# EAGLE board Dashboard r2 (EAGLE 7.4.0)
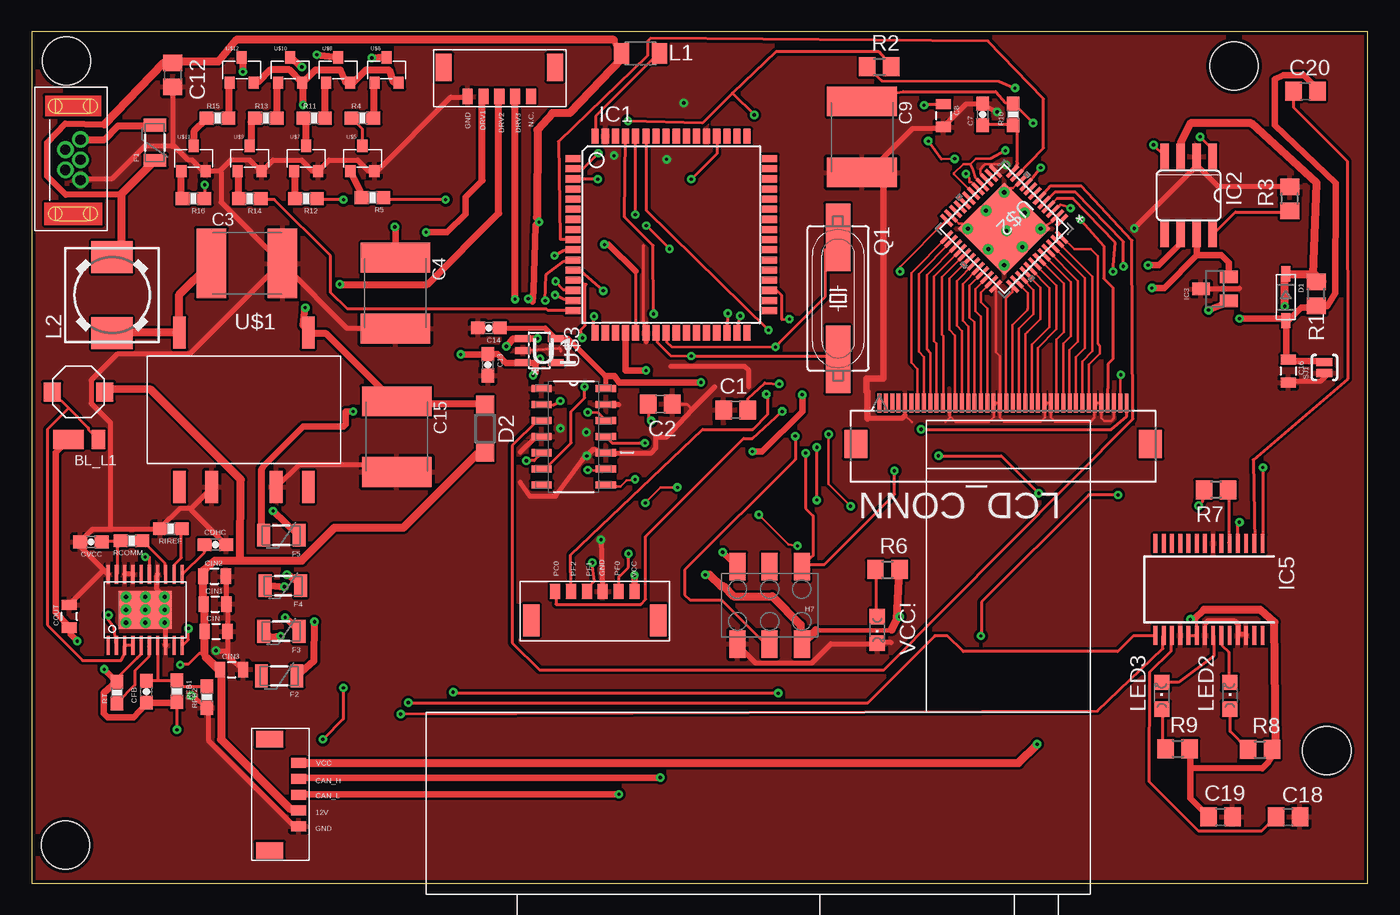
[diagram p0: board, top side]
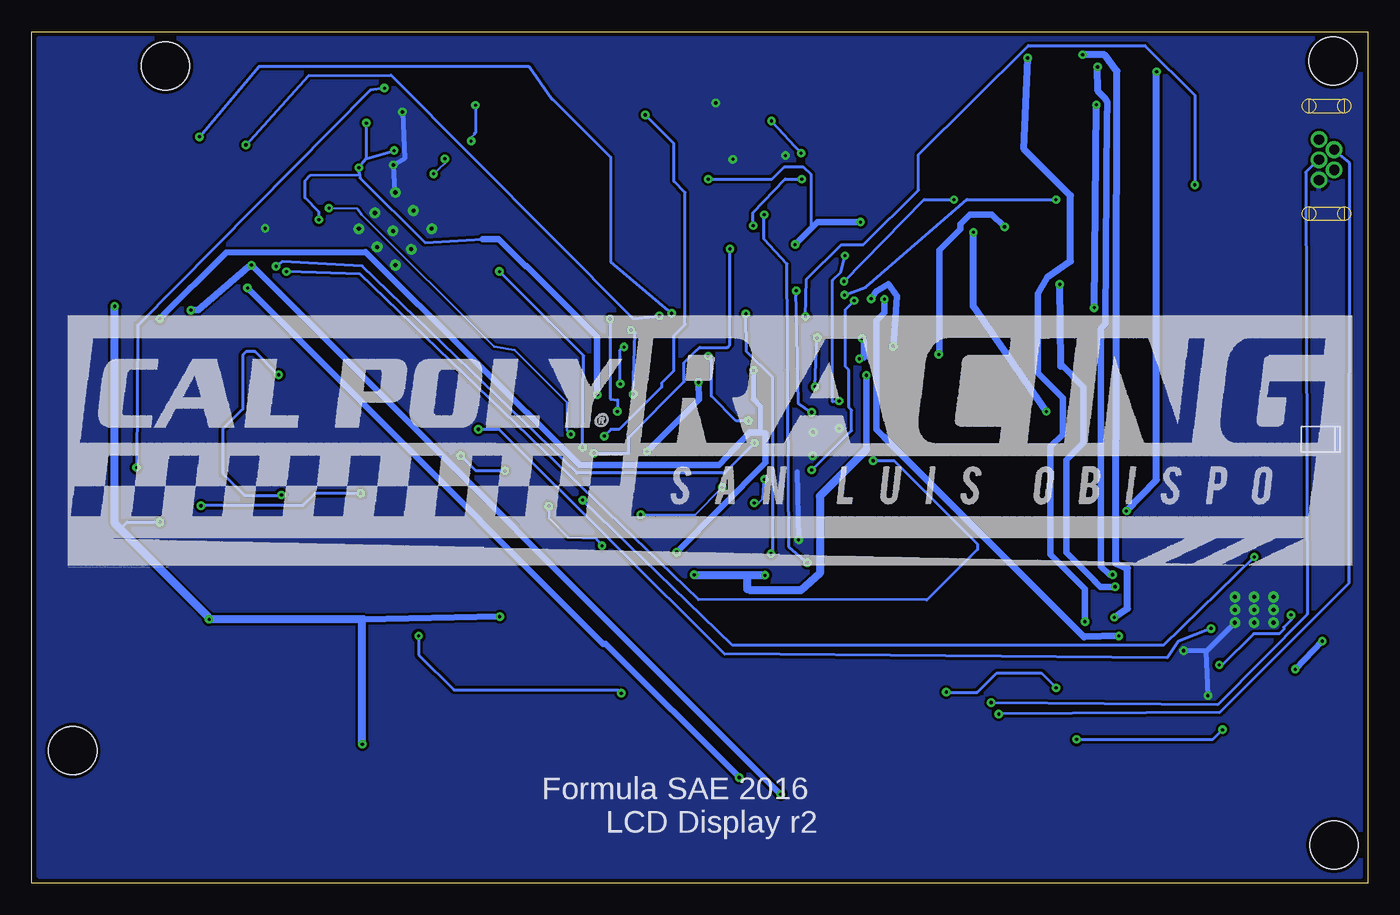
[diagram p1: board, bottom side, seen from below]

Size 105.5 x 67.24 mm. Coordinates in mm from the lower left corner, seen from the top.
Outline: 0,0 105.5,0 105.5,67.24 0,67.24 0,0
Copper layers (1*16): Top 0.035559375mm / dielectric 1.501140625mm / Bottom 0.035559375mm
Design rules "advancedcircuits *": minimum track width 7mil, minimum drill 10mil, track to track 7mil, track to pad 7mil, pad to pad 7mil, via to via 7mil, smd to smd 7mil, copper to edge 11mil, drill to drill 11mil, minimum pad ring 10mil, minimum via ring 8mil, stop-mask expansion 0mil, vias tented up to drill 0mil, thermal gap 10mil
Net classes: 0 default: width 0.254 mm, clearance 0.205 mm; 1 Class1: width 0.508 mm, clearance 0.205 mm to class 0, clearance 0.205 mm; 2 Class2: width 0.635 mm, clearance 0.205 mm to class 0, clearance 0.205 mm to class 1, clearance 0.205 mm; 3 Class3: width 0.559 mm, clearance 0.205 mm to class 0, clearance 0.205 mm to class 1, clearance 0.205 mm to class 2, clearance 0.205 mm; 4 Class4: width 0.406 mm, clearance 0.205 mm to class 0, clearance 0.205 mm to class 1, clearance 0.205 mm to class 2, clearance 0.205 mm to class 3, clearance 0.205 mm; 5 Class5: width 0.178 mm, drill 0.178 mm, clearance 0.178 mm to class 0, clearance 0.178 mm to class 1, clearance 0.178 mm to class 2, clearance 0.178 mm to class 3, clearance 0.178 mm to class 4, clearance 0.178 mm
Holes 3.81 mm at 2.76,64.91 2.67,3.01 102.26,10.46 94.93,64.53

## Footprints (pad centres in the part's own frame; a part is rotated, then mirrored left to right if it is on the bottom)
POWERDI-123 = smd 1.05 x 1.5: A -0.85,0 | smd 2.4 x 1.5: C 1.525,0
2-SMD = smd 1.35 x 1.5: 1 -2.075,0; 2 2.075,0
C0805 = smd 1.3 x 1.5: 1 -0.95,0; 2 0.95,0
C2220 = smd 2.35 x 5.5: 1 -2.8,0; 2 2.8,0
0603-CAP = smd 1.1 x 1: 1 -0.85,0; 2 0.85,0
0805 = smd 0.8 x 1.2: 1 -0.9,0; 2 0.9,0
MICRO5LOCK = smd 0.8 x 1.2: P1 -2.5,0; P2 -1.25,0; P3 0,0; P4 1.25,0; P5 2.5,0 | smd 1.3 x 2.15: P$6 -4.4,2.295; P$7 4.4,2.295
SOD-123 = smd 1.2 x 0.7: A 1.85,0; C -1.85,0
SOD123 = smd 1.4 x 1.4: A 1.9,0; C -1.9,0
PTC-1206 = smd 1 x 1.8: 1 -1.4,0; 2 1.4,0
2X3_SMD_FCI_54202-G30 = smd 1.27 x 2.18: 1 -2.54,-3.05; 2 -2.54,3.05; 3 0,-3.05; 4 0,3.05; 5 2.54,-3.05; 6 2.54,3.05
TQFP64 = smd 1.194 x 0.559: 1 -7.76,6; 2 -7.76,5.2; 3 -7.76,4.4; 4 -7.76,3.6; 5 -7.76,2.8; 6 -7.76,2; 7 -7.76,1.2; 8 -7.76,0.4; 9 -7.76,-0.4; 10 -7.76,-1.2; 11 -7.76,-2; 12 -7.76,-2.8; 13 -7.76,-3.6; 14 -7.76,-4.4; 15 -7.76,-5.2; 16 -7.76,-6; 33 7.76,-6; 34 7.76,-5.2; 35 7.76,-4.4; 36 7.76,-3.6; 37 7.76,-2.8; 38 7.76,-2; 39 7.76,-1.2; 40 7.76,-0.4; 41 7.76,0.4; 42 7.76,1.2; 43 7.76,2; 44 7.76,2.8; 45 7.76,3.6; 46 7.76,4.4; 47 7.76,5.2; 48 7.76,6 | smd 0.559 x 1.194: 17 -6,-7.76; 18 -5.2,-7.76; 19 -4.4,-7.76; 20 -3.6,-7.76; 21 -2.8,-7.76; 22 -2,-7.76; 23 -1.2,-7.76; 24 -0.4,-7.76; 25 0.4,-7.76; 26 1.2,-7.76; 27 2,-7.76; 28 2.8,-7.76; 29 3.6,-7.76; 30 4.4,-7.76; 31 5.2,-7.76; 32 6,-7.76; 49 6,7.76; 50 5.2,7.76; 51 4.4,7.76; 52 3.6,7.76; 53 2.8,7.76; 54 2,7.76; 55 1.2,7.76; 56 0.4,7.76; 57 -0.4,7.76; 58 -1.2,7.76; 59 -2,7.76; 60 -2.8,7.76; 61 -3.6,7.76; 62 -4.4,7.76; 63 -5.2,7.76; 64 -6,7.76
SO08 = smd 0.66 x 2.032: 1 -1.905,-3.073; 2 -0.635,-3.073; 3 0.635,-3.073; 4 1.905,-3.073; 5 1.905,3.073; 6 0.635,3.073; 7 -0.635,3.073; 8 -1.905,3.073
SOT-23 = smd 1 x 1.4: 1 -0.95,-1.1; 2 0.95,-1.1; 3 0,1.1
SSOP28 = smd 0.381 x 1.499: 1 -4.225,-3.625; 2 -3.575,-3.625; 3 -2.925,-3.625; 4 -2.275,-3.625; 5 -1.625,-3.625; 6 -0.975,-3.625; 7 -0.325,-3.625; 8 0.325,-3.625; 9 0.975,-3.625; 10 1.625,-3.625; 11 2.275,-3.625; 12 2.925,-3.625; 13 3.575,-3.625; 14 4.225,-3.625; 15 4.225,3.625; 16 3.575,3.625; 17 2.925,3.625; 18 2.275,3.625; 19 1.625,3.625; 20 0.975,3.625; 21 0.325,3.625; 22 -0.325,3.625; 23 -0.975,3.625; 24 -1.625,3.625; 25 -2.275,3.625; 26 -2.925,3.625; 27 -3.575,3.625; 28 -4.225,3.625
L3216C = smd 1.2 x 1.6: 1 -1.5,0; 2 1.5,0
DR73 = smd 2.5 x 3.25: 1 -3,0; 2 3,0
HIROSE_FH12A-40S-0.5SH(55) = smd 1.803 x 2.21: 41 -11.633,6.68; 42 11.633,6.68 | smd 0.305 x 1.499: P1 -9.754,3.429; P2 -9.246,3.429; P3 -8.738,3.429; P4 -8.255,3.429; P5 -7.747,3.429; P6 -7.239,3.429; P7 -6.756,3.429; P8 -6.248,3.429; P9 -5.74,3.429; P10 -5.258,3.429; P11 -4.75,3.429; P12 -4.242,3.429; P13 -3.759,3.429; P14 -3.251,3.429; P15 -2.743,3.429; P16 -2.261,3.429; P17 -1.753,3.429; P18 -1.245,3.429; P19 -0.762,3.429; P20 -0.254,3.429; P21 0.254,3.429; P22 0.762,3.429; P23 1.245,3.429; P24 1.753,3.429; P25 2.261,3.429; P26 2.743,3.429; P27 3.251,3.429; P28 3.759,3.429; P29 4.242,3.429; P30 4.75,3.429; P31 5.258,3.429; P32 5.74,3.429; P33 6.248,3.429; P34 6.756,3.429; P35 7.239,3.429; P36 7.747,3.429; P37 8.255,3.429; P38 8.738,3.429; P39 9.246,3.429; P40 9.754,3.429
CHIPLED_0805 = smd 1.2 x 1.2: A 0,-1.05; C 0,1.05
HC49UP = smd 5.334 x 1.93: 1 -4.826,0; 2 4.826,0
R0805 = smd 1.3 x 1.5: 1 -0.95,0; 2 0.95,0
0603-RES = smd 1.1 x 1: 1 -0.85,0; 2 0.85,0
MICRO6LOCK = smd 0.8 x 1.2: P1 3.125,0; P2 1.875,0; P3 0.625,0; P4 -0.625,0; P5 -1.875,0; P6 -3.125,0 | smd 1.3 x 2.5: P$1 -5.025,2.295; P$2 5.025,2.295
SJ_2S-NO = smd 0.635 x 1.27: 1 -0.45,0; 2 0.45,0
SOIC127P600X175-14N = smd 1.6 x 0.559: 1 -2.54,3.81; 2 -2.54,2.54; 3 -2.54,1.27; 4 -2.54,0; 5 -2.54,-1.27; 6 -2.54,-2.54; 7 -2.54,-3.81; 8 2.54,-3.81; 9 2.54,-2.54; 10 2.54,-1.27; 11 2.54,0; 12 2.54,1.27; 13 2.54,2.54; 14 2.54,3.81
V78XX-1000 = smd 1 x 2.54: 1 -5.08,-6.096; 5 5.08,-6.096; 6 5.08,6.096; 7 2.54,6.096; 9 -2.54,6.096; 10 -5.08,6.096
RGZ48_5P15X5P15 = smd 1.245 x 0.279: 1 -3.683,2.743; 2 -3.683,2.261; 3 -3.683,1.753; 4 -3.683,1.245; 5 -3.683,0.762; 6 -3.683,0.254; 7 -3.683,-0.254; 8 -3.683,-0.762; 9 -3.683,-1.245; 10 -3.683,-1.753; 11 -3.683,-2.261; 12 -3.683,-2.743; 25 3.683,-2.743; 26 3.683,-2.261; 27 3.683,-1.753; 28 3.683,-1.245; 29 3.683,-0.762; 30 3.683,-0.254; 31 3.683,0.254; 32 3.683,0.762; 33 3.683,1.245; 34 3.683,1.753; 35 3.683,2.261; 36 3.683,2.743 | smd 0.279 x 1.245: 13 -2.743,-3.683; 14 -2.261,-3.683; 15 -1.753,-3.683; 16 -1.245,-3.683; 17 -0.762,-3.683; 18 -0.254,-3.683; 19 0.254,-3.683; 20 0.762,-3.683; 21 1.245,-3.683; 22 1.753,-3.683; 23 2.261,-3.683; 24 2.743,-3.683; 37 2.743,3.683; 38 2.261,3.683; 39 1.753,3.683; 40 1.245,3.683; 41 0.762,3.683; 42 0.254,3.683; 43 -0.254,3.683; 44 -0.762,3.683; 45 -1.245,3.683; 46 -1.753,3.683; 47 -2.261,3.683; 48 -2.743,3.683 | smd 5.156 x 5.156: EP 0,0 | drill 0.33: V_1 -2.032,2.032; V_2 0,2.032; V_3 2.032,2.032; V_4 -2.032,0.254; V_5 0,0.254; V_6 2.032,0.254; V_7 -2.032,-2.032; V_8 0,-2.032; V_9 2.032,-2.032
SOT23-DBV = smd 0.55 x 1.2: 1 -0.95,-1.3; 2 0,-1.3; 3 0.95,-1.3; 4 0.95,1.3; 5 -0.95,1.3
PWP0020A = smd 0.25 x 1.5: 1 -2.925,-2.8; 2 -2.275,-2.8; 3 -1.625,-2.8; 4 -0.975,-2.8; 5 -0.325,-2.8; 6 0.325,-2.8; 7 0.975,-2.8; 8 1.625,-2.8; 9 2.275,-2.8; 10 2.925,-2.8; 11 2.925,2.8; 12 2.275,2.8; 13 1.625,2.8; 14 0.975,2.8; 15 0.325,2.8; 16 -0.325,2.8; 17 -0.975,2.8; 18 -1.625,2.8; 19 -2.275,2.8; 20 -2.925,2.8 | smd 4.2 x 3: EP 0,0 | drill 0.33: P$1 -1.524,1.016; P$2 0,1.016; P$3 1.524,1.016; P$4 -1.524,0; P$5 0,0; P$6 1.524,0; P$7 1.524,-1.016; P$8 0,-1.016; P$9 -1.524,-1.016
SOT-23-3 = smd 0.8 x 0.976: P$1 0,1; P$2 -0.95,-1; P$3 0.95,-1
MUSBB = drill 0.8: P1 -1.6,0; P2 -0.8,-1.2; P3 0,0; P4 0.8,-1.2; P5 1.6,0

## Placement (x,y rotation side)
BL_D1  DFLS1100-7  [POWERDI-123]  4.42,35.05 180 top
BL_L1  47uH  [2-SMD]  3.7,38.8 180 top
C1  18pF  [C0805]  55.58,37.37 0 top
C2  18pF  [C0805]  49.65,37.83 180 top
C3  22uF  [C2220]  17,48.94 0 top
C4  22uF  [C2220]  28.72,46.59 270 top
C7  100nF  [0603-CAP]  75.09,60.7 90 top
C8  4.7uF  [0805]  72,60.62 270 top
C9  10uF  [C2220]  65.56,58.92 270 top
C12  100n  [C0805]  11.15,63.82 270 top
C13  1uF  [0603-CAP]  36.02,40.92 270 top
C14  1uF  [0603-CAP]  36.1,43.84 180 top
C15  10uF  [C2220]  28.82,35.26 270 top
C16  4.7nF  [0805]  99.21,40.44 270 top
C18  100n  [C0805]  99.19,5.22 0 top
C19  100n  [C0805]  93.86,5.22 0 top
C20  100n  [C0805]  100.57,62.52 0 top
CANPWR  MICRO5LOCK  [MICRO5LOCK]  21.09,6.99 90 top
CDHC  390nF  [0603-CAP]  14.51,26.73 0 top
CFB  10.0pF  [0603-CAP]  9.05,15.1 90 top
CIN  4.7uF  [0805]  14.56,19.87 0 top
CIN1  4.7uF  [0805]  14.48,22.03 0 top
CIN2  4.7uF  [0805]  14.43,24.23 0 top
CIN3  4.7uF  [0805]  15.79,16.86 0 top
COUT  120nF  [0805]  2.96,21.07 90 top
CVCC  1uF  [0603-CAP]  4.69,26.94 180 top
D1  1N4148  [SOD-123]  99.03,46.26 270 top
D2  1N5819  [SOD123]  35.81,35.89 270 top
F1  16V,0.25A  [PTC-1206]  9.73,58.46 90 top
F2  15V,0.5A  [PTC-1206]  19.55,16.37 180 top
F3  15V,0.5A  [PTC-1206]  19.71,19.89 180 top
F4  15V,0.5A  [PTC-1206]  19.84,23.49 180 top
F5  15V,0.5A  [PTC-1206]  19.71,27.47 180 top
H7  ICSP  [2X3_SMD_FCI_54202-G30]  58.27,21.94 180 top
IC1  AT90CAN128  [TQFP64]  50.49,51.21 0 top
IC2  MCP2551SO8  [SO08]  91.35,54.31 180 top
IC3  NUP2105L  [SOT-23]  93.43,46.93 90 top
IC5  FT232RL  [SSOP28]  92.96,23.19 180 top
L1  CS321613-100K  [L3216C]  48.08,65.53 0 top
L2  22uH  [DR73]  6.35,46.43 90 top
LCD_CONN  FH12A-40S-0.5SH(55)  [HIROSE_FH12A-40S-0.5SH(55)]  76.7,41.35 180 top
LED2  RX  [CHIPLED_0805]  94.61,14.79 0 top
LED3  TX  [CHIPLED_0805]  89.23,14.79 0 top
LEDOUT  MICRO5LOCK  [MICRO5LOCK]  36.93,62.12 0 top
Q1  56P2859  [HC49UP]  63.67,46.18 270 top
R1  100K  [R0805]  101.44,46.54 90 top
R2  1k  [R0805]  66.92,64.47 0 top
R3  100K  [R0805]  99.32,54.04 90 top
R4  [0603-RES]  26.11,60.4 0 top
R5  [0603-RES]  26.92,54.14 180 top
R6  1K  [R0805]  67.57,24.75 0 top
R7  1k  [R0805]  93.52,31.06 180 top
R8  1k  [R0805]  96.98,10.55 0 top
R9  1k  [R0805]  90.49,10.61 0 top
R10  47k  [0603-RES]  77.5,60.7 90 top
R11  [0603-RES]  22.3,60.4 0 top
R12  [0603-RES]  21.67,54.05 180 top
R13  [0603-RES]  18.49,60.4 0 top
R14  [0603-RES]  17.22,54.05 180 top
R15  [0603-RES]  14.68,60.4 0 top
R16  [0603-RES]  12.78,54.05 180 top
RCOMM  52.3k  [0603-RES]  7.89,27.05 180 top
RFB1  309k  [0603-RES]  11.47,15.15 270 top
RFB2  16.2k  [0603-RES]  13.84,14.68 90 top
RIREF  20.5k  [0603-RES]  10.98,27.98 180 top
ROT/PUSH  MICRO6LOCK  [MICRO6LOCK]  44.46,23.03 180 top
RT  226k  [0603-RES]  6.75,15.04 90 top
SJ1  SOLDERJUMPERNO  [SJ_2S-NO]  102.08,40.72 90 top
U1  74LCX125M  [SOIC127P600X175-14N]  42.79,35.26 0 top
U$1  V7805-1000  [V78XX-1000]  16.76,37.37 180 top
U$2  FT801  [RGZ48_5P15X5P15]  76.79,51.67 225 top
U$3  LP5907-3.3  [SOT23-DBV]  40.08,42.06 270 top
U$4  LM3492HC  [PWP0020A]  8.97,21.58 0 top
U$5  MMBT4401-7-F  [SOT-23-3]  26.11,57.23 0 top
U$6  MMBT4403-7-F  [SOT-23-3]  28.02,64.21 0 top
U$7  MMBT4401-7-F  [SOT-23-3]  21.67,57.23 0 top
U$8  MMBT4403-7-F  [SOT-23-3]  24.21,64.21 0 top
U$9  MMBT4401-7-F  [SOT-23-3]  17.22,57.23 0 top
U$10  MMBT4403-7-F  [SOT-23-3]  20.4,64.21 0 top
U$11  MMBT4401-7-F  [SOT-23-3]  12.78,57.23 0 top
U$12  MMBT4403-7-F  [SOT-23-3]  16.59,64.21 0 top
U$13  TCG043WQLBAANN-GN00  [TCG043WQLBAANN]  60.19,6.3 0 top
U$14  MUSBB  [MUSBB]  3.86,57.12 270 top
VCC!  PWR  [CHIPLED_0805]  66.76,20 180 top

## Library data of the parts
BL_D1 = diodes-inc
BL_L1 = tdk
C1 C2 C12 C18-C20 L1 R1-R3 R6-R9 = rcl
C3 C4 C9 C15 = resistor
C7 C8 C13 C14 C16 CDHC CIN CIN1-CIN3 CVCC = SparkFun-Capacitors
CANPWR LEDOUT ROT/PUSH U$14 = DashAndCAN library
CFB COUT RFB1 RFB2 RIREF RT SJ1 = SparkFun-Passives
D1 = adafruit
D2 = diode
F1-F5 = SparkFun
H7 = SparkFun-Connectors
IC1 = at90can128
IC2 = can
IC3 = Artificial Science
IC5 = SmartPrj
L2 = inductors
LCD_CONN = hirose; MPN: FH12A-40S-0.5SH(55); OC_FARNELL: 1324569; OC_NEWARK: 34M6194; PACKAGE: SOCKET FFC/FPC, ZIF, 0.5MM, 40WAY; SUPPLIER: Hirose
LED2 LED3 VCC! = led
Q1 = SparkFun-FreqCtrl
R4 R5 R10-R16 RCOMM = SparkFun-Resistors
U1 = Fairchild_By_element14_Batch_1; MPN: 74LCX125M; OC_FARNELL: 1013776; OC_NEWARK: 78K6286; PACKAGE: SOIC-14; SUPPLIER: Fairchild
U$1 U$5-U$12 = formula electric
U$2 = ftdichip
U$3 U$4 = texas
U$13 = kyocera

## Nets
3.3V: C9.1 C14.1 LCD_CONN.P4 R10.2 U1.14 U$2.9 U$2.16 U$2.18 U$3.5
12V [Class2]: BL_L1.1 CANPWR.P2 CIN1.1 CIN2.1 CIN3.1 CIN.1 D2.A U$4.2
12V_PROTECTED [Class3]: C15.1 D2.C U$1.1 U$6.P$3 U$8.P$3 U$10.P$3 U$12.P$3
AREF: IC1.62
AVR_CS: IC1.10 U1.2
AVR_MISO: IC1.13 U1.6
AVR_MOSI: IC1.12 U1.12
AVR_SCLK: IC1.11 U1.9
B2: LCD_CONN.P23 U$2.35
B3: LCD_CONN.P24 U$2.34
B4: LCD_CONN.P25 U$2.33
B5: LCD_CONN.P26 U$2.32
B6: LCD_CONN.P27 U$2.31
B7: LCD_CONN.P28 U$2.30
BACKLIGHT_CTRL: U$2.24 U$4.15
BL_ANODE [Class1]: BL_D1.C CFB.1 COUT.1 LCD_CONN.P2 RFB1.2 RT.2 U$4.5
BL_CATHODE: LCD_CONN.P1 U$4.10
CAN_H [Class1]: CANPWR.P4 IC2.7 IC3.2
CAN_L [Class1]: CANPWR.P3 IC2.6 IC3.1
D+: IC5.15 U$14.P3
D-: IC5.16 U$14.P2
DATA_EN: LCD_CONN.P34 U$2.25
DCLK: LCD_CONN.P30 U$2.29
DISP_EN: LCD_CONN.P31 U$2.28
DRV1 [Class3]: F5.2 LEDOUT.P2
DRV2 [Class3]: F4.2 LEDOUT.P3
DRV3 [Class3]: F3.2 LEDOUT.P4
DRV4: F2.2
DTR: C20.1 IC5.2
FT801_CS_N: U1.3 U$2.6
FT801_MISO: U1.5 U$2.4
FT801_MOSI: U1.11 U$2.5
FT801_SCLK: U1.8 U$2.3
G2: LCD_CONN.P15 U$2.42
G3: LCD_CONN.P16 U$2.41
G4: LCD_CONN.P17 U$2.40
G5: LCD_CONN.P18 U$2.39
G6: LCD_CONN.P19 U$2.38
G7: LCD_CONN.P20 U$2.37
GND [Class4]: C1.1 C2.1 C3.2 C4.2 C7.2 C8.2 C9.2 C12.2 C13.2 C14.2 C15.2 C16.2 C18.2 C19.2 CANPWR.P1 CDHC.2 CIN1.2 CIN2.2 CIN3.2 CIN.2 COUT.2 CVCC.2 H7.6 IC1.22 IC1.53 IC1.63 IC2.2 IC3.3 IC5.7 IC5.18 IC5.21 IC5.25 IC5.26 LCD_CONN.P3 LCD_CONN.P5 LCD_CONN.P6 LCD_CONN.P13 LCD_CONN.P14 LCD_CONN.P21 LCD_CONN.P22 LCD_CONN.P29 LCD_CONN.P36 LEDOUT.P1 R3.2 RFB2.1 RIREF.2 ROT/PUSH.P4 SJ1.1 U1.1 U1.4 U1.10 U1.13 U$1.7 U$1.9 U$2.2 U$2.10 U$2.13 U$2.15 U$2.23 U$2.36 U$2.EP U$2.V_1 U$2.V_2 U$2.V_3 U$2.V_4 U$2.V_5 U$2.V_6 U$2.V_7 U$2.V_8 U$2.V_9 U$3.2 U$4.8 U$4.14 U$4.17 U$4.18 U$4.20 U$4.EP U$4.P$1 U$4.P$2 U$4.P$3 U$4.P$4 U$4.P$5 U$4.P$6 U$4.P$7 U$4.P$8 U$4.P$9 U$5.P$3 U$7.P$3 U$9.P$3 U$11.P$3 U$14.P5 VCC!.C
HSYNC: LCD_CONN.P32 U$2.27
INT_N: IC1.9 U$2.11
M8RXD: IC5.1 R2.1
M8TXD: IC5.5 R7.1
N$1 [Class2]: U1.7
N$2: C8.1 U$2.17
N$3: C7.1 R10.1 U$2.12
N$4: CVCC.1 RCOMM.2 U$4.19
N$5: RCOMM.1 U$4.13
N$6: IC2.8 R3.1
N$7: CDHC.1 U$4.11
N$8: BL_D1.A BL_L1.2 U$4.3 U$4.4
N$9: R6.1 VCC!.A
N$10: CFB.2 RFB1.1 RFB2.2 U$4.7
N$11: C1.2 IC1.24 Q1.1
N$12: RT.1 U$4.6
N$13: C3.1 L2.1 U$1.5
N$14: RIREF.1 U$4.12
N$22: IC1.64 L1.2
N$23 [Class3]: R5.2 U$5.P$2
N$24 [Class3]: R4.2 U$6.P$2
N$25: R4.1 U$5.P$1
N$26 [Class3]: F2.1 U$6.P$1
N$27 [Class3]: R12.2 U$7.P$2
N$28 [Class3]: R11.2 U$8.P$2
N$29 [Class3]: R11.1 U$7.P$1
N$30 [Class3]: F3.1 U$8.P$1
N$31 [Class3]: R14.2 U$9.P$2
N$32: IC5.23 LED2.C
N$33 [Class3]: R13.2 U$10.P$2
N$34: IC5.22 LED3.C
N$35: LED2.A R8.1
N$36: LED3.A R9.1
N$37 [Class3]: R13.1 U$9.P$1
N$38 [Class3]: F4.1 U$10.P$1
N$39 [Class3]: R16.2 U$11.P$2
N$40 [Class3]: R15.2 U$12.P$2
N$41 [Class3]: R15.1 U$11.P$1
N$42 [Class3]: F5.1 U$12.P$1
PA0: IC1.51
PA1: IC1.50
PA2: IC1.49
PA3: IC1.48
PA4: IC1.47
PA5: IC1.46
PA6: IC1.45
PA7: IC1.44
PB4(PWM): IC1.14 R5.1
PB5(PWM): IC1.15 R12.1
PB6(PWM): IC1.16 R14.1
PB7(PWM): IC1.17 R16.1
PC0: IC1.35 ROT/PUSH.P1
PC4: IC1.39
PD4: IC1.29
PD7: IC1.32
PE2: IC1.4
PE3(PWM): IC1.5
PE4(PWM): IC1.6
PE5(PWM): IC1.7
PE6: IC1.8
PF0: IC1.61 ROT/PUSH.P5
PF1: IC1.60 ROT/PUSH.P3
PF2: IC1.59 ROT/PUSH.P2
PF3: IC1.58
PG0: IC1.33
PG1: IC1.34
R2: LCD_CONN.P7 U$2.48
R3: LCD_CONN.P8 U$2.47
R4: LCD_CONN.P9 U$2.46
R5: LCD_CONN.P10 U$2.45
R6: LCD_CONN.P11 U$2.44
R7: LCD_CONN.P12 U$2.43
RESET [Class1]: C16.1 C20.2 D1.A H7.5 IC1.20 R1.1 SJ1.2
RX: H7.4 IC1.2 R2.2
RX1: IC1.27
RXCAN: IC1.31 IC2.4
SCK: H7.3
SCL: IC1.25
SDA: IC1.26
TCK: IC1.57
TDI: IC1.54
TDO: IC1.55
TMS: IC1.56
TX: H7.1 IC1.3 R7.2
TX1: IC1.28
TXCAN: IC1.30 IC2.1
USB_V_IN [Class3]: F1.2 U$14.P1
VCC [Class1]: C4.1 C12.1 C13.1 C19.1 CANPWR.P5 D1.C F1.1 H7.2 IC1.21 IC1.52 IC2.3 IC5.4 IC5.19 IC5.20 L1.1 L2.2 R1.2 R6.2 R8.2 R9.2 ROT/PUSH.P6 U$3.1 U$3.3
VCC3O: C18.1 IC5.17
VSYNC: LCD_CONN.P33 U$2.26
XTAL1: C2.2 IC1.23 Q1.2

## Tracks (layer width: path | path; a pad name or v marks a point on that pad's centre or on a via)
3.3V  (via drill 0.25, 0.25 pad 0.25)
  Top 0.178: 79.04,55.7 78.54,55.2 | U$2.18 72.83,55.98 72.83,56.06 73.55,56.78 74.1,56.78 | 75.73,57.21 74.53,57.21 74.1,56.78 | U$2.16 75.06,55.18 74.52,55.72 74.31,56.36 74.1,56.78
  Top 0.254: 74.33,54.52 U$2.18 | 75.08,55.16 U$2.16 | C9.1 66.52,62.15 68.82,62.5 76.13,62.5 76.87,61.64 77.46,61.64 R10.2 77.57,61.53 v79.08,60.02 | v79.67,56.5 79.04,55.7 | 78.54,55.2 U$2.9 | v82.82,52.4 84.65,50.3 84.65,47.75 85.36,47.04 85.36,41.37 84.98,40.99 84.98,39.08 84.94,39.04 84.94,37.94 LCD_CONN.P4 | 84.95,37.96 LCD_CONN.P4 | v76.88,57.85 75.73,57.21 | 84.98,37.95 LCD_CONN.P4
  Top 0.406: C14.1 40.55,43.84 U$3.5 42.35,43.01 45.31,40.05 45.31,39.09 U1.14
  Top 0.508: 45.31,40.05 46.03,40.05 46.37,39.55 v52.85,39.55 | v56.91,34.09 57.67,34.09 60.85,37.26 v60.85,38.57
  Bottom 0.254: v79.08,60.02 79.08,57.21 | 79.08,57.21 v79.67,56.5 | v79.67,56.5 79.63,56.13 79.58,55.68 74.45,50.59 69.9,50.84 | 79.08,57.21 v76.88,57.85 | v82.82,52.4 82.82,53 83.92,54.11 83.92,55.47 83.5,55.89 79.6,55.93 v79.67,56.5
  Bottom 0.508: v52.85,39.55 52.8,38.19 v56.91,34.09 | v60.85,38.57 60.85,43.15 66.44,48.73 66.52,48.73 68.64,50.85 69.89,50.85 69.9,50.84
12V  (via drill 0.25 pad 0.25)
  Top 0.254: v11.73,17.23 11.77,17.27 12.37,17.27 13.23,18.14 13.66,18.14 13.77,18.14 13.77,17.81 | U$4.2 6.53,20.15 6.06,20.79 v6.06,21.17
  Top 0.635: CANPWR.P2 21,5.83 20.46,5.83 14.96,11.34 14.96,16.62 13.77,17.81 CIN3.1 | 13.66,18.14 CIN.1 13.66,20.19 13.66,22.02 CIN1.1 13.55,22.35 13.55,24.18 CIN2.1 13.56,24.69 14.47,25.48 16.47,25.48 | 16.47,25.48 21.32,25.48 23.92,28.07 29.35,28.07 35.18,33.9 35.79,33.9 D2.A | 16.47,25.48 16.51,31.86 9.4,38.97 5.74,39.01 BL_L1.1
  Bottom 0.254: v11.73,17.23 11.48,17.23 9.02,19.69 6.99,19.69 6.65,20.03 6.65,20.2 6.06,20.79 v6.06,21.17
12V_PROTECTED  (via drill 0.25)
  Top 0.559: U$12.P$3 17.55,63.26 17.87,63.26 18.84,64.23 20.35,64.23 21.32,63.26 U$10.P$3 | U$10.P$3 21.54,63.37 22.4,64.23 24.36,64.23 24.78,63.26 25.1,63.26 U$8.P$3 25.43,63.26 26.4,64.23 28.22,64.23 28.56,63.26 28.88,63.26 U$6.P$3 | D2.C 35.79,37.89 28.99,37.89 28.88,38 C15.1 28.56,38.11 23.27,43.4 21.87,43.4 U$1.1 21.76,43.72 21.43,44.04 v21.6,45.44 | v21.43,61.47 21.43,62.94 U$10.P$3
  Bottom 0.559: v21.6,45.44 v21.43,61.47
AVR_CS  (via drill 0.25)
  Top 0.254: v41.28,49.55 42.05,49.98 42.7,49.98 IC1.10 | v41.74,38.07 41.18,37.77 40.32,37.78 U1.2
  Bottom 0.254: v41.28,49.55 41.62,48.25 42.27,47.61 42.27,38 v41.74,38.07
AVR_MISO  (via drill 0.25 pad 0.25)
  Top 0.254: IC1.13 42.81,47.61 43.35,47.61 43.67,47.28 43.79,47.27 43.7,47.19 43.7,44.03 43.32,43.65 v43.49,43.06 | U1.6 40.32,32.82 40.65,32.82 42.59,34.76 42.59,37.24 43.67,38.32 43.67,39.2 v43.66,39.21
  Bottom 0.254: v43.66,39.21 v43.49,43.06
AVR_MOSI  (via drill 0.25)
  Top 0.254: v45.13,46.78 43.35,48.36 42.81,48.36 IC1.12 | v43.91,37.18 44.75,37.13 45.29,36.59 U1.12
  Bottom 0.254: v45.13,46.78 44.97,37.89 v43.91,37.18
AVR_SCLK  (via drill 0.25)
  Top 0.254: v40.55,46.01 40.63,48.04 42.05,49.12 42.7,49.12 IC1.11 | v43.91,32.62 45.07,32.49 45.29,32.71 U1.9
  Bottom 0.254: v43.91,32.62 40.76,35.73 40.76,37.35 40.97,37.57 40.97,40.5 41.24,40.77 41.24,45.31 v40.55,46.01
B2
  Top 0.178: U$2.35 75.78,47.45 74.95,46.62 74.95,45.9 75.46,45.39 LCD_CONN.P23
B3
  Top 0.178: U$2.34 75.42,47.81 74.52,46.91 74.52,45.18 74.95,44.76 LCD_CONN.P24
B4
  Top 0.178: U$2.33 75.06,48.17 74.06,47.17 74.06,44.67 74.44,44.29 LCD_CONN.P25
B5
  Top 0.178: U$2.32 74.72,48.51 73.51,47.3 73.51,44.42 73.97,43.95 73.97,37.94 LCD_CONN.P26
B6
  Top 0.178: U$2.31 74.36,48.87 73.04,47.55 73.04,44.03 73.47,43.61 73.47,37.94 LCD_CONN.P27
B7
  Top 0.178: U$2.30 73.98,49.25 72.45,47.72 72.45,43.7 72.92,43.23 72.92,37.95 LCD_CONN.P28
BACKLIGHT_CTRL  (via drill 0.25)
  Top 0.178: v68.56,48.3 68.56,48.66 U$2.24
  Top 0.254: v62,30.25 v62,34.42 | 72.17,52.25 U$2.24 | 9.34,24.4 U$4.15 9.29,25.75 v8.96,25.75
  Bottom 0.254: v62,30.25 61.95,30.16 50.15,18.78 16.14,18.78 v8.96,25.75 | v62,34.42 61.91,41.65 v68.56,48.3
BL_ANODE  (via drill 0.25, 0.25 pad 0.25)
  Top 0.178: LCD_CONN.P2 85.95,40.09 v86,40.14
  Top 0.254: v85.79,30.66 83.46,30.66 74.99,22.19 74.99,19.56 v74.95,19.52 | v58.94,14.99 33.37,14.99 v33.28,15.07 | v24.6,15.41 24.6,12.96 v23,11.35 | v11.48,12.11 11.48,14.29 RFB1.2 | 6.54,16.09 6.65,16.09 8.35,17.78 | 8.35,17.78 | 8.35,17.78 8.51,17.95 | 8.51,17.95 | 8.51,17.95 8.64,18.08 U$4.5
  Top 0.508: RFB1.2 11.39,14.25 9.13,14.25 CFB.1 8.91,14.03 8.05,13.09 6.02,13.09 5.7,13.41 5.7,15.01 6.64,15.87 RT.2 6.54,16.09 v5.73,16.89 | BL_D1.C 2.87,34.98 1.89,34 1.89,21.37 2.87,20.4 2.87,20.19 COUT.1 3.08,19.97 3.08,19.63 v3.59,19.11
  Bottom 0.254: v86,40.14 86.04,40.14 87.86,41.96 88.58,41.96 88.84,41.71 88.84,37.43 90.4,35.86 90.4,32.35 88.67,30.61 85.83,30.61 v85.79,30.66 | v74.95,19.52 74.95,18.04 72.15,15.24 59.2,15.24 v58.94,14.99 | v33.28,15.07 30.83,15.07 29.3,16.6 25.79,16.6 v24.6,15.41 | v23,11.35 12.24,11.35 v11.48,12.11
  Bottom 0.508: v3.59,19.11 v5.73,16.89
BL_CATHODE  (via drill 0.25)
  Top 0.254: v70.23,35.84 85.23,35.84 86.46,36.86 86.46,37.89 LCD_CONN.P1 | v12.37,20.1 12.37,19.21 11.93,18.78 U$4.10
  Bottom 0.254: v70.23,35.84 68.58,35.84 50.8,18.1 15.83,17.8 14.97,19.09 v12.37,20.1
CAN_H  (via drill 0.25 pad 0.51)
  Top 0.508: CANPWR.P4 21.11,8.31 46.06,8.31 46.07,8.3 49.59,8.3 v49.63,8.34 | 94.51,47.93 IC3.2 94.51,47.89 94.51,48.99 93.92,49.58 92.01,49.58 | 92.03,51.17 IC2.7 92.01,51.2 92.01,49.58 | v88.45,47 89.43,47 92.01,49.58
  Bottom 0.508: v49.63,8.34 60.17,18.88 60.38,18.88 70.12,28.62 70.12,28.66 82.23,40.77 | 82.23,40.77 | 82.23,40.77 v88.45,47
CAN_L  (via drill 0.25)
  Top 0.508: v46.37,7.02 21.11,7.02 CANPWR.P3 | v88.15,48.79 89.01,48.79 90.63,50.41 90.63,51.17 IC2.6 | v92.92,45.24 94.51,45.88 IC3.1
  Bottom 0.508: v46.37,7.02 v88.15,48.79 88.36,48.69 92.35,45.24 v92.92,45.24
D+  (via drill 0.25)
  Top 0.254: v29.75,14.25 66.02,14.25 71.31,19.54 71.32,19.52 72.32,19.52 73.55,18.29 85.74,18.29 86.99,19.54 88.69,19.54 IC5.15
  Bottom 0.254: v29.75,14.25 11.86,14.08 4.79,21.24 4.92,56.13 3.95,57.11 U$14.P3
D-  (via drill 0.25)
  Top 0.254: v29.14,13.35 84.15,13.6 89.33,18.53 89.33,19.54 IC5.16
  Bottom 0.254: v29.14,13.35 11.69,13.47 1.51,23.66 1.47,56.89 2.65,57.86 U$14.P2
DATA_EN
  Top 0.178: U$2.25 72.24,50.98 69.44,48.19 69.44,41.11 69.95,40.61 LCD_CONN.P34
DCLK
  Top 0.178: U$2.29 73.64,49.59 73.64,49.58 73.59,49.58 71.86,47.85 71.86,43.32 71.98,43.19 71.98,37.95 LCD_CONN.P30
DISP_EN
  Top 0.178: U$2.28 73.28,49.95 71.22,47.89 71.22,42.81 71.43,42.6 71.43,37.93 LCD_CONN.P31
DRV1  (via drill 0.25)
  Top 0.508: 18.18,32.71 18.3,32.95 21.43,36.08 24.65,36.08 24.77,36.2 24.77,37.23 v25.38,37.24 | v31.15,51.4 32.81,51.4 34.26,52.84 34.26,54.17 35.57,55.49
  Top 0.559: 35.57,55.49 35.57,62.07 LEDOUT.P2 | 18.18,32.71 18.18,27.53 F5.2
  Bottom 0.559: v31.15,51.4 31.15,45.55 v25.38,37.24
DRV2  (via drill 0.25)
  Top 0.559: v24.32,47.28 31.26,47.28 36.87,52.9 36.87,62.07 LEDOUT.P3 | v19.95,23.41 18.52,23.53 F4.2
  Bottom 0.508: v19.95,23.41 21.12,23.41 21.55,23.84 21.55,23.88 23.8,26.12 23.8,33.41 22.45,34.76 22.45,39.19 24.24,40.99
  Bottom 0.559: 24.24,40.8 24.24,40.99 v24.32,47.28
DRV3  (via drill 0.25)
  Top 0.559: v38.16,46.11 38.16,62.07 LEDOUT.P4 | v19.66,19.52 18.84,19.43 18.41,19.86 F3.2
  Bottom 0.508: v38.16,46.11 38.16,45.04 38.79,44.42 38.79,35.81 38.16,35.19
  Bottom 0.559: 38.16,35.19 22.4,19.43 v19.66,19.52
DTR
  Top 0.254: IC5.2 96.57,26.88 96.44,33.41 103.91,39.82 103.86,57.02 99.65,61.23 C20.1
FT801_CS_N
  Top 0.254: U$2.6 79.7,54.19 80.43,55.05 82.87,55.05 86.87,50.75 86.96,36.66 67.3,16.84 40.08,16.84 37.95,18.97 37.95,34.54 39.89,36.49 40.22,36.49 U1.3
FT801_MISO  (via drill 0.25)
  Top 0.178: 80.96,54.06 80.33,53.48
  Top 0.254: 80.96,54.06 82.23,54.06 85.55,50.56 v85.39,48.3 | v39.05,33.36 39.68,33.36 40.22,33.9 U1.5 | 80.33,53.48 U$2.4
  Bottom 0.254: v85.39,48.3 79.56,48.08 52.85,22.39 34.82,22.35 30.82,26.34 30.82,26.77 37.41,33.36 v39.05,33.36
FT801_MOSI  (via drill 0.25)
  Top 0.254: v86.2,48.71 86.2,50.65 82.4,54.58 80.8,54.58 79.94,53.76 U$2.5 | v48.42,34.76 45.83,34.76 U1.11
  Bottom 0.254: v86.2,48.71 85.96,48.92 85.73,49.07 79.39,48.73 62.45,32.38 50.8,32.38 v48.42,34.76
FT801_SCLK  (via drill 0.25 pad 0.25)
  Top 0.178: U$2.3 80.65,53.04 81.05,53.44 81.09,53.44 81.21,53.56 81.76,53.44 v82.02,53.31 | v62.92,35.44 62.92,31.5 v64.66,29.77 | v60.47,26.63 59.75,26.76 v57.42,29.09 | v50.98,31.25 49.67,31.25 v48.44,30.02 | v47.64,31.88 46.96,31.8 46.49,31.33 45.45,31.33 U1.8
  Bottom 0.178: v62.92,35.44 63.22,35.74 63.22,37.94 67.37,42.09 68.98,42.38 79.44,52.8 79.73,53.18 79.82,53.27 v82.02,53.31 | v64.66,29.77 64.66,28.84 63.13,27.31 60.93,27.23 v60.47,26.63 | v57.42,29.09 53.14,29.09 v50.98,31.25 | v48.44,30.02 48.1,30.02 47.81,30.32 47.68,32.05 v47.64,31.88
G2
  Top 0.178: U$2.42 79.21,48.88 80.92,47.17 80.92,43.74 79.44,42.26 79.44,37.93 LCD_CONN.P15
G3
  Top 0.178: U$2.41 78.85,48.51 80.37,47 80.37,43.91 78.97,42.51 LCD_CONN.P16
G4
  Top 0.178: U$2.40 78.51,48.18 79.65,47.04 79.65,44.54 78.63,43.53 | 78.63,43.53 | 78.63,43.53 78.46,43.36 LCD_CONN.P17
G5
  Top 0.178: U$2.39 78.15,47.82 78.21,47.76 78.21,47.72 79.1,46.83 79.1,44.92 77.95,43.78 LCD_CONN.P18
G6
  Top 0.178: U$2.38 77.79,47.46 78.67,46.58 78.67,45.39 78.63,45.35 78.63,45.26 77.45,44.08 77.45,37.94 LCD_CONN.P19
G7
  Top 0.178: U$2.37 77.45,46.67 76.94,46.15 76.94,37.94 LCD_CONN.P20
GND  (via drill 0.25)
  Top 0.178: 76.47,37.95 LCD_CONN.P21 | U$2.36 76.12,41.93 76.43,41.62 76.43,37.94 LCD_CONN.P21 | LCD_CONN.P36 68.96,36.94 69.49,36.41 | 72.15,36.41 72.49,36.75 72.49,37.89 LCD_CONN.P29 72.46,36.91 72.96,36.41 75.58,36.41 75.96,36.8 75.96,37.9 LCD_CONN.P22 LCD_CONN.P21 | LCD_CONN.P21 76.45,36.78 76.77,36.46 79.69,36.46 79.99,36.75 79.99,37.89 LCD_CONN.P14 LCD_CONN.P13 80.46,36.78 80.79,36.46 83.63,36.46 83.92,36.75 83.92,37.91 LCD_CONN.P6 LCD_CONN.P5 84.45,36.73 84.69,36.5 85.24,36.5 85.45,36.71 LCD_CONN.P3 | U$2.10 78.13,55.52 77.49,54.88 77.12,54.88 U$2.V_7 | U$2.23 72.61,52.68 73.21,52.08 73.51,52.08 U$2.V_9 | U$2.2 80.97,52.68 80.49,52.21 80.28,52.04 U$2.V_1 | U$2.15 75.41,55.52 74.91,56.02 74.91,56.4 75.16,56.65 | 75.16,56.65 | 75.16,56.65 75.29,56.78 75.54,56.78 | 75.54,56.78 75.56,56.78 | 75.56,56.78 U$2.13 76.1,56.22 75.54,56.78 | 75.56,56.78 76.3,56.78 76.56,56.79 v76.94,56.71 | IC5.21 92.68,19.61
  Top 0.254: C2.1 51.73,37.83 52.15,37.41 | 48.42,43.61 48.42,44.06 48.31,44.16 48.31,50.31 48.29,50.37 | 92.68,20.51 92.68,19.61 | U$3.2 41.67,42.27 41.8,42
  Top 0.406: R3.2 99.26,55.05 93.65,55.05 92.03,56.67 92.03,57.32 IC2.2 91.92,56.57 v87.07,51.71 | C16.2 99.26,39.62 101.75,39.62 102.18,40.05 SJ1.1 | 92.36,46.85 IC3.3 92.46,46.96 95.38,46.96 | IC5.26 95.81,19.65 95.27,19.65 IC5.25 95.27,19.86 95.27,20.4 94.95,20.73 92.9,20.73 92.68,20.51 | U$2.V_6 75.62,49.98 76.7,48.9 U$2.EP | U$2.V_3 76.81,48.9 U$2.EP | U$2.V_5 76.92,51.6 U$2.EP | U$2.V_9 74,51.71 75.3,53 U$2.EP | U$2.EP 75.41,53.11 U$2.V_8 75.41,53.22 76.7,54.52 U$2.V_7 | U$2.V_2 78.21,50.3 76.92,50.3 U$2.EP | U$2.V_1 79.62,51.71 78.43,52.9 U$2.EP | U$2.V_4 78.43,53 U$2.EP | 65.97,36.7 68.71,36.7 68.93,36.92 68.96,36.94 | C9.2 65.59,55.63 69.55,59.59 71.84,59.59 C8.2 72.06,59.8 73.79,61.53 75.08,61.53 C7.2 75.19,61.42 v76.22,60.9 | 67.85,19 66.88,19 VCC!.C 66.66,18.89 63.1,18.89 61.59,17.38 57.16,17.38 55.76,18.78 H7.6 55.55,18.89 | CIN3.2 15.5,17.92 15.5,19.86 CIN.2 15.5,19.97 15.5,21.91 CIN1.2 | 15.39,22.13 CIN1.2 | CIN2.2 15.39,24.18 15.39,22.24 CIN1.2 | CANPWR.P1 21,4.53 20.68,4.53 13.98,11.23 13.98,13.82 RFB2.1 13.77,13.93 v12.63,14.81 | 12.58,29.58 11.72,29.58 10.21,28.07 RIREF.2 9.99,27.96 6.21,27.96 | 12.58,29.58 14.2,31.2 U$1.7 | CDHC.2 15.28,26.77 12.58,29.47 12.58,29.58 | 5.67,24.72 6,24.4 U$4.20 | 5.67,24.72 3.95,26.45 3.95,26.88 CVCC.2 3.95,27.09 4.81,27.96 6.21,27.96 | 5.67,24.72 2.97,22.02 COUT.2 | U$4.18 7.4,24.4 7.94,24.4 U$4.17 | U$4.14 9.88,24.29 9.88,23.21 10.42,22.67 U$4.P$5 | U$4.8 10.53,18.78 10.53,20.51 U$4.P$5 | U$4.P$9 7.51,20.62 7.51,21.48 U$4.P$5 | U$4.P$8 9.02,20.62 9.45,21.05 U$4.P$5 | U$4.P$5 7.51,21.59 U$4.P$4 7.51,21.7 7.51,22.56 U$4.P$1 | 9.02,21.59 U$4.P$5
  Top 0.406: U$4.P$2 9.02,22.56 9.45,22.13 U$4.P$5 | U$4.P$7 10.53,20.62 U$4.P$5 | U$4.P$6 10.42,21.48 10.42,21.27 10.21,21.05 U$4.P$5 | U$4.P$3 10.53,22.67 U$4.P$5 | v14.55,18.35 15.39,18.35 | v44.95,27.12 45.07,23.1 ROT/PUSH.P4 | 46.37,37.78 45.4,37.78 U1.13 | 48.53,42.75 48.53,43.4 IC1.22 48.42,43.61 | 50.47,40.8 56.3,40.8 56.62,40.48 56.62,39.19 | 45.4,58.94 IC1.63 | 53.93,39.19 52.15,37.41 50.1,35.19 49.34,35.19 49.28,35.25 49.28,34.35 48.96,33.98 45.55,33.98 U1.10 45.29,33.9 44.37,34.28 v43.83,33.74 43.89,33.84 43.48,33.46 41.38,30.55 39.33,30.55 38.57,31.65 | U$1.9 19.38,31.3 21.11,33.03 28.23,33.03 28.77,32.49 C15.2 | 40.65,35.3 40.32,35.3 U1.4 40.11,35.19 39.78,35.19 38.57,34.02 | 40.76,38.97 40.32,38.97 U1.1 | 14.85,56.24 13.77,56.24 U$11.P$3 13.55,56.24 12.69,57.11 12.37,57.11 11.18,58.29 | 14.85,56.24 15.71,57.11 17.22,57.11 18.09,56.24 U$9.P$3 18.3,56.35 19.06,57.11 21.32,57.11 22.19,56.24 22.51,56.24 U$7.P$3 22.73,56.35 23.48,57.11 25.75,57.11 26.61,56.24 27.05,56.24 U$5.P$3 27.26,56.24 33.09,62.07 34.39,62.07 LEDOUT.P1 | 11.18,58.29 11.18,62.83 C12.2 | U$14.P5 3.95,55.59 6.32,55.59 8.91,58.19 11.07,58.19 11.18,58.29 | C3.2 19.71,49.01 14.96,53.76 14.96,56.13 14.85,56.24 | C4.2 28.66,43.83 24.89,43.83 19.92,48.79 C3.2 | 6.21,27.96 6.21,36.38 4.7,37.89 4.7,39.73 6.75,41.78 12.47,41.78 19.6,48.9 C3.2 | 65.69,55.99 C9.2 | 65.46,56.02 C9.2
  Top 0.508: 65.46,56.02 67.24,56.02 67.24,39.84 65.93,39.84 65.93,38.83 65.97,38.83 65.97,36.7
  Bottom 0.406: U$2.V_7 76.81,54.62 v76.94,56.71 76.06,57.21 v76.22,60.9 | 79.73,51.71 U$2.V_1 | 12.8,18.24 v12.63,14.81 | 12.8,18.24 10.53,20.51 U$4.P$7 | v14.55,18.35 12.91,18.35 12.8,18.24 | 45.07,32.49 v44.95,27.12
  other vias: 43.78,35.61 41.75,35.91 51.49,61.61 50.14,57.16 45.99,57.46
  pour Top: 0.22,0.25 105.27,0.25 105.27,66.94 0.3,66.94 0.22,66.94
  pour Bottom: 0.55,66.69 104.93,66.69 104.93,64.61 104.93,0.55 0.55,0.55 0.55,1.02
HSYNC
  Top 0.178: U$2.27 72.94,50.29 70.67,48.02 70.67,42.17 70.97,41.88 LCD_CONN.P32
INT_N
  Top 0.254: IC1.9 42.7,50.84 42.16,50.84 41.73,50.85 41.6,58.57 48.64,65.35 48.64,66.5 48.85,66.71 75.5,66.5 79.89,61.94 79.89,58.05 77.85,55.92 U$2.11
M8RXD  (via drill 0.25)
  Top 0.254: v97.21,32.82 97.21,26.88 IC5.1 | v77.64,62.78 76.93,63.08 76.38,63.32 67.1,63.37 66.02,64.45 R2.1
  Bottom 0.254: v97.21,32.82 97.13,44.03 78.76,62.61 v77.64,62.78
M8TXD
  Top 0.254: IC5.5 94.51,26.88 94.51,30.98 R7.1
N$2  (via drill 0.25 pad 0.25)
  Top 0.178: U$2.17 74.72,54.85 74.68,54.85 74.19,55.34 74.06,55.34 74.06,55.68 v73.76,56.02 | v72.87,57.2 71.81,57.16 v70.8,58.6 | 72.03,61.49 C8.1
  Top 0.254: 72.03,61.49 70.51,61.49 v70.46,61.44
  Bottom 0.178: 70.54,59.19 70.54,59.15 70.88,58.81 v70.8,58.6 | v72.87,57.2 72.87,56.87 v73.76,56.02
  Bottom 0.254: v70.46,61.44 70.46,59.28 70.54,59.19
N$3
  Top 0.254: C7.1 75.19,59.91 77.46,59.91 R10.1 77.57,59.8 77.78,59.59 77.78,57 77.84,56.8 77.46,56.24 U$2.12
N$4
  Top 0.254: CVCC.1 5.56,26.99 6.97,26.99 RCOMM.2 6.75,26.88 6.75,24.4 U$4.19
N$5
  Top 0.254: RCOMM.1 8.8,26.99 10.53,25.26 10.53,24.4 U$4.13
N$6
  Top 0.254: R3.1 99.26,53 95.05,53 93.33,51.28 IC2.8
N$7
  Top 0.254: CDHC.1 13.66,26.66 13.66,26.12 11.93,24.4 U$4.11
N$8
  Top 0.254: U$4.4 7.94,18.78 7.4,18.78 U$4.3 7.29,18.68 7.29,18.03 7.05,17.58 4.03,17.58 1.25,20.4 1.25,35.84 2.92,37.51 | 2.92,37.51 1.68,38.75 BL_L1.2 | 2.92,37.51 4.49,35.95 4.49,35.84 5.24,35.08 BL_D1.A
N$9
  Top 0.254: VCC!.A 66.66,21.05 66.66,24.72 R6.1
N$10
  Top 0.254: 9.99,15.98 11.39,15.98 RFB1.1 11.5,15.98 11.93,15.54 13.88,15.54 RFB2.2 | 9.99,15.98 9.13,15.98 CFB.2 | 9.99,15.98 9.99,18.68 U$4.7
N$11  (via drill 0.25 pad 0.25)
  Top 0.254: IC1.24 50.13,42.72 50.52,42.38 v58.73,42.34 59.01,42.66 62.67,46.32 62.67,50.01 Q1.1 | C1.2 56.57,38.28 57.88,39.51 v59.03,39.42
  Bottom 0.254: v59.03,39.42 59.03,41.58 59.03,42.09 58.98,42.13 v58.73,42.34
N$12
  Top 0.254: RT.1 6.75,14.25 8.15,15.65 8.15,16.78 9.23,17.86 9.23,18.68 U$4.6
N$13
  Top 0.254: 11.61,43.5 U$1.5 11.61,43.61 | 6.43,43.5 L2.1 | 14.09,48.9 C3.1
  Top 0.635: 6.43,43.5 11.61,43.5 | 11.61,43.61 11.61,46.42 14.09,48.9
N$14
  Top 0.254: RIREF.1 11.83,27.96 11.83,25.69 11.29,25.15 11.29,24.4 U$4.12
N$22
  Top 0.254: IC1.64 44.53,59.05 44.53,60.56 49.5,65.53 L1.2
N$23
  Top 0.559: U$5.P$2 25.21,56.13 25.97,54.59 R5.2
N$24
  Top 0.559: U$6.P$2 27.05,63.15 27.05,60.45 R4.2
N$25
  Top 0.254: U$5.P$1 26.07,58.29 26.07,59.59 25.32,60.34 R4.1
N$26  (via drill 0.25)
  Top 0.559: v26.86,65.16 27.37,65.2 U$6.P$1 | v22.34,20.65 22.29,17.53 21,16.41 F2.1
  Bottom 0.508: v22.34,20.65 22.34,23.22 25.07,25.96 25.07,34.47 24.1,35.44 24.1,38.32 26.04,40.27 26.04,46.56 25.29,47.86
  Bottom 0.559: v26.86,65.16 27.15,57.97 23.48,54.3 23.48,49.12 25.29,47.86
N$27
  Top 0.559: U$7.P$2 20.79,56.13 20.79,54.08 R12.2
N$28
  Top 0.559: U$8.P$2 23.16,63.15 23.16,60.45 R11.2
N$29
  Top 0.559: U$7.P$1 21.65,58.29 21.65,60.24 21.54,60.34 R11.1
N$30  (via drill 0.25)
  Top 0.559: v22.52,65.41 24.13,65.2 U$8.P$1 | v20.01,20.98 21.11,19.97 F3.1
  Bottom 0.559: v22.52,65.41 20.77,65.41 19.81,64.12 19.9,25.26 18.98,24.85 18.98,21.68 v20.01,20.98
N$31
  Top 0.559: U$9.P$2 16.36,56.13 16.36,54.08 R14.2
N$32
  Top 0.254: LED2.C 94.51,15.87 94.51,18.24 93.97,18.78 93.97,19.54 IC5.23
N$33
  Top 0.559: U$10.P$2 19.38,63.15 19.38,60.45 R13.2
N$34
  Top 0.254: LED3.C 89.33,15.87 90.52,15.87 93.33,17.96 93.33,19.54 IC5.22
N$35
  Top 0.254: LED2.A 94.62,13.71 94.62,11.98 96.03,10.58 R8.1
N$36
  Top 0.254: LED3.A 89.33,13.71 89.33,10.79 89.44,10.69 R9.1
N$37
  Top 0.559: U$9.P$1 17.33,58.29 17.33,60.13 17.55,60.34 R13.1
N$38  (via drill 0.25)
  Top 0.559: v21.34,64.45 20.46,65.2 U$10.P$1 | v20.16,24.36 21.32,23.53 F4.1
  Bottom 0.508: v20.16,24.36 20.42,24.36 21.09,25.02 21.09,43.78 20.71,44.16 20.62,60.84 20.58,60.97 20.58,61.63 20.7,61.89
  Bottom 0.559: v21.34,64.45 21.3,62.54 20.7,61.89
N$39
  Top 0.559: U$11.P$2 11.83,56.13 11.83,54.08 R16.2
N$40
  Top 0.559: U$12.P$2 15.6,63.15 15.6,60.45 R15.2
N$41
  Top 0.559: U$11.P$1 12.8,58.29 12.8,59.37 13.77,60.34 R15.1
N$42  (via drill 0.25)
  Top 0.559: v16.68,64.08 16.68,65.2 U$12.P$1 | v19.06,29.39 21.11,27.42 F5.1
  Bottom 0.559: v16.68,64.08 16.68,31.84 v19.06,29.39
PB4(PWM)  (via drill 0.25)
  Top 0.254: v32.69,53.98 27.68,53.98 R5.1 | v41.37,47.52 41.99,46.85 42.7,46.85 IC1.14
  Bottom 0.254: v32.69,53.98 35.04,53.98 v41.37,47.52
PB5(PWM)  (via drill 0.25)
  Top 0.254: v24.62,53.98 22.62,53.98 R12.1 | v41.32,46.44 42.05,46.09 42.7,46.09 IC1.15
  Bottom 0.254: v24.62,53.98 31.65,53.98 39.61,47.08 v41.32,46.44
PB6(PWM)
  Top 0.254: R14.1 18.09,53.98 19.17,53.98 23.59,49.55 23.59,46.64 24.94,45.34 40.65,45.34 40.76,45.23 42.7,45.23 IC1.16
PB7(PWM)  (via drill 0.25)
  Top 0.254: v13.66,55.14 13.66,54.08 R16.1 | v44.4,44.75 44.32,43.61 44.43,43.5 IC1.17
  Bottom 0.254: v13.66,55.14 13.66,62.21 17.59,66.15 26.82,66.15 35.47,57.54 35.47,54.73 39.83,50.41 41.58,50.41 44.32,47.71 v44.4,44.75
PC0  (via drill 0.25 pad 0.25)
  Top 0.254: v59.26,37.25 56.91,35.11 56.22,35.11 48.48,27.37 48.48,22.41 48.1,22.02 41.4,22.02 41.4,22.78 41.4,22.99 ROT/PUSH.P1 | IC1.35 58.35,46.74 58.89,46.74 59.22,46.42 59.22,44.52 v59.83,44.54
  Bottom 0.254: v59.83,44.54 59.83,38.23 59.24,38.15 59.24,37.48 v59.26,37.25
PF0  (via drill 0.25)
  Top 0.254: v49.11,44.96 49.07,50.35 46.82,52.59 46.91,58.94 IC1.61 | v47.12,26.02 47.12,24.94 46.37,24.18 46.37,23.1 ROT/PUSH.P5
  Bottom 0.254: v49.11,44.96 49.07,41.99 46.98,39.94 46.98,26.12 v47.12,26.02
PF1  (via drill 0.25)
  Top 0.254: v47.66,52.79 47.66,58.94 IC1.60 | v44.26,25.3 44.43,23.86 43.89,23.32 43.89,23.1 ROT/PUSH.P3
  Bottom 0.254: v47.66,52.79 47.66,50.84 45.85,48.9 45.72,26.56 v44.26,25.3
PF2  (via drill 0.25 pad 0.25)
  Top 0.254: v58.18,43.67 48.53,53.11 48.53,58.94 IC1.59 | ROT/PUSH.P2 42.59,23.1 42.55,25.93 52.97,35.84 56.95,35.84 58.14,37.03 58.14,38.36 v58.01,38.62
  Bottom 0.254: v58.01,38.62 57.84,43.46 v58.18,43.67
R2
  Top 0.178: U$2.48 81.33,50.99 81.37,50.99 82.32,50.05 83.63,50.05 84.18,49.5 84.18,42.6 84.35,42.43 84.35,41.83 83.46,40.95 LCD_CONN.P7
R3
  Top 0.178: U$2.47 80.99,50.65 83.75,47.89 83.75,42 82.95,41.2 LCD_CONN.P8
R4
  Top 0.178: U$2.46 80.63,50.29 83.16,47.76 83.16,42.26 82.44,41.54 LCD_CONN.P9
R5
  Top 0.178: U$2.45 80.27,49.89 82.61,47.55 82.61,42.77 81.93,42.09 81.93,37.95 LCD_CONN.P10
R6
  Top 0.178: U$2.44 79.93,49.6 82.06,47.47 82.06,43.19 81.47,42.6 81.47,37.94 LCD_CONN.P11
R7
  Top 0.178: U$2.43 79.6,49.25 81.51,47.34 81.51,43.53 80.92,42.94 80.92,37.95 LCD_CONN.P12
RESET  (via drill 0.25)
  Top 0.508: SJ1.2 102.18,41.13 102.07,41.24 99.26,41.24 C16.1 99.05,41.45 99.05,44.37 D1.A | D1.A 99.26,44.48 100.24,45.45 101.96,45.45 R1.1 102.29,45.55 102.92,46.61 102.96,55.27 98.17,59.85 98.17,63.48 98.83,63.8 100.45,63.8 101.42,62.83 101.42,62.61 C20.2 | v48.51,40.49 46.91,40.48 46.91,43.4 IC1.20 | v54.57,26.12 55.65,25.04 H7.5 | v95.38,44.58 98.83,44.58 D1.A
  Bottom 0.406: v48.51,40.49 48.51,38.22 47.98,37.68 47.98,35.56 47.93,35.6
  Bottom 0.508: v54.57,26.12 47.58,33.2 47.58,35.52 47.93,35.6 48.83,35.6 51.23,33.03 62.24,33.03 79.13,49.84 90.16,49.8 v95.38,44.58
RX  (via drill 0.25)
  Top 0.254: v44.75,57.65 43.56,56.46 42.81,56.46 IC1.2 | v47.08,60.19 52.95,60.02 55.33,62.4 | 55.33,62.4 58.76,65.65 66.88,65.65 67.85,64.55 R2.2 | v60.3,35.3 60.3,33.47 51.55,24.72 51.55,22.78 51.98,22.35 54.47,22.35 57.92,18.89 58.24,18.89 H7.4 | 55.33,62.4 v57.06,60.67
  Bottom 0.254: v47.08,60.19 v44.75,57.65 | v57.06,60.67 54.79,58.4 54.79,55.42 53.9,54.54 53.9,44.12 54.79,43.23 54.79,40.48 55.76,39.51 55.76,39.17 59.11,35.82 59.77,35.82 v60.3,35.3
RXCAN  (via drill 0.25)
  Top 0.254: v55.94,44.8 55.76,44.15 55.76,43.5 IC1.31 | v88.58,58.29 89.44,57.43 IC2.4
  Bottom 0.254: v55.94,44.8 58.03,44.58 77.13,63.81 83.61,63.77 v88.58,58.29
TX  (via drill 0.25, 0.25 pad 0.25)
  Top 0.254: v44.71,55.59 42.81,55.59 IC1.3 | v50.36,50.09 v48.53,51.92 | v92.14,29.79 92.46,30.12 92.46,30.98 R7.2 | v68.13,32.56 68.13,30.7 62.59,25.15 61.11,25.15 60.84,25.04 H7.1 61.7,25.87 61.7,29 61.11,29.59 v61.11,33.96 | v71.6,33.75 76.56,33.75 v79.52,30.78
  Bottom 0.254: v44.71,55.59 46.02,55.59 48.53,52.96 v48.53,51.92 | v50.36,50.09 50.36,42.51 50.58,42.3 52.76,42.3 52.97,42.09 53.02,42.09 53.99,41.11 53.99,39.59 58.35,35.23 58.35,33.96 v61.11,33.96 | v68.13,32.56 70.42,32.56 v71.6,33.75 | v79.52,30.78 83.12,30.78 84.09,29.81 92.13,29.81 v92.14,29.79
TXCAN  (via drill 0.25)
  Top 0.254: v54.97,44.99 54.9,44.15 54.9,43.5 IC1.30 | v92.25,58.94 93.22,57.97 93.22,57.43 IC2.1
  Bottom 0.254: v92.25,58.94 87.54,64.5 66.23,64.5 64.41,61.9 64.36,61.9 59.79,57.33 59.79,49.04 v54.97,44.99
USB_V_IN
  Top 0.559: F1.2 9.67,59.8 6.83,59.8 5.75,58.73 3.95,58.73 U$14.P1
VCC  (via drill 0.25, 0.25 pad 0.25)
  Top 0.254: IC5.4 95.23,28.37 v95.36,28.5 | 47.68,48.31 47.68,43.47 IC1.21 | IC1.52 54.09,57.6 v52.08,55.59 | IC5.19 IC5.20 91.98,20.62 92.05,21.11
  Top 0.406: 61.91,19.97 67.89,20.01
  Top 0.508: 10.42,64.77 11.07,64.77 C12.1 11.39,64.88 | 5.73,59.91 2.66,59.95 1.23,58.49 1.23,55.81 2.68,54.36 7.06,54.41 7.08,54.41 | 9.67,57 F1.1 | 7.06,49.44 L2.2 | 101.21,48.04 101.42,48.04 101.96,47.5 R1.2 | 99.05,48.04 D1.C 98.94,47.82 | 90.74,58.51 90.74,57.43 IC2.3 | 91.49,9.11 91.49,6.69 92.9,5.29 C19.1 | 91.49,9.11 91.49,10.58 R9.2 | 91.49,9.11 97.16,9.07 97.59,9.5 97.81,9.82 97.86,10.47 R8.2 98.24,10.75 | 92.57,21.59 92.05,21.11 91.71,20.83 v91.49,20.83 | 68.5,24.72 R6.2 | 60.84,18.89 H7.2 60.72,18.97 | v68.55,21.05 68.33,20.83 | 45.96,66.6 46.37,65.63 L1.1 46.59,65.08 | ROT/PUSH.P6 47.59,24.3 v47.6,24.3 | v53.19,24.35 53.52,24.35 | C4.1 28.73,51.77 v28.67,51.83 | v33.88,41.75 36,41.75 C13.1 36.78,41.77 37.48,41.07 38.74,41.07 U$3.3 38.82,41.07 39.8,41.07 | v39.94,43.01 U$3.1 38.65,43.01 38.03,43.02 37.52,42.43 v37.48,42.38 | 39.8,41.07 v40.14,41.41 40.14,41.33 39.8,40.99 | v39.21,46.15 39.55,45.94 39.63,46.79 39.8,51.95 v40.06,52.21 39.89,52.59 | v45.22,50.43 45.56,50.43 47.68,48.31 | 39.8,41.07 39.8,40.99 | 39.8,40.99 39.8,40.31 v39.59,40.1
  Top 0.635: 5.73,59.91 10.42,64.77 | 9.67,57 7.08,54.41 | 7.06,54.41 7.06,49.44 | 99.05,48.04 101.21,48.04 101.46,55.29 96.29,59.99 91.5,59.99 90.74,58.51 | 92.57,21.59 97,21.59 98.11,20.59 98.24,10.75 | 68.5,24.72 68.33,20.83 67.89,20.01 | 60.84,18.89 61.91,19.97 | v98.94,45.55 98.94,47.82 | 11.39,64.88 14.74,64.88 16.16,66.6 45.96,66.6 | CANPWR.P5 77.91,9.49 v79.39,10.97 | 53.52,24.35 54.41,23.46 54.62,23.46 55.43,22.65 58.48,22.65 60.72,20.41 60.72,18.97 | 46.59,65.08 42.47,60.8 41.12,60.8 39.93,59.49 39.89,52.59
  Bottom 0.254: v95.36,28.5 97.98,28.5 98.51,27.96 | v52.08,55.59 47.05,55.59 46.07,56.57 44.59,56.57 43.95,55.98 43.95,51.7 44.48,51.17
  Bottom 0.508: v68.55,21.05 79.31,20.83 79.39,20.75 | 91.6,21.05 v91.49,20.83 | 53.14,24.3 v53.19,24.35 | v28.67,51.83 28.71,51.83 29.68,52.8 31.42,52.8 32.18,52.04 32.18,51.66 33.83,50.01 33.83,41.79 v33.88,41.75 | v37.48,42.38 37.18,46.36 37.86,47.3 38.83,46.7 v39.21,46.15 | v40.06,52.21 43.45,52.21 44.48,51.17 v45.22,50.43 | v39.59,40.1 39.59,34.26 | 48.99,24.22 48.91,24.3 | v39.94,43.01 39.98,43.01 39.8,42.85 39.8,41.49 v40.14,41.41
  Bottom 0.635: 79.31,20.83 v91.49,20.83 | v98.94,45.55 98.94,28.39 98.51,27.96 91.6,21.05 | v79.39,10.97 79.39,20.75 | v47.6,24.3 48.91,24.3 53.14,24.3 | 39.59,34.26 43.28,30.57 43.28,24.47 44.76,23.12 48.78,23.12 48.99,23.2 48.99,24.22
VCC3O
  Top 0.254: IC5.17 89.98,19.54 89.98,18.33 88.3,16.69 88.25,7.99 92.14,4.1 97.11,4.1 98.18,5.18 C18.1
VSYNC
  Top 0.178: U$2.26 72.58,50.65 70.04,48.1 70.04,41.96 70.46,41.54 LCD_CONN.P33
XTAL1  (via drill 0.25 pad 0.25)
  Top 0.254: IC1.23 49.38,42.72 50.43,41.66 v52.08,41.62 63.4,41.62 Q1.2 | C2.2 48.7,36.71 v48.91,36.5
  Bottom 0.254: v48.91,36.5 49.88,36.5 51.83,38.45 51.83,41.37 v52.08,41.62

## Text on the board
bPlace: /Users/thomaswillson/Google Drive/Cal Poly SAE General/Logos/2015 Cal Poly Racing Logo/CPRacingSLO-BW-Final-PCB.BMP
tNames: GND | N.C. | DRV1 | DRV2 | DRV3 | PC0 | PF2 | PF1 | GND | PF0 | VCC | VCC | CAN_H | CAN_L | 12V | GND
bNames: Formula SAE 2016 / LCD Display r2